# Altium PCB Pira-Smart-RS485-Addon_BAK.PcbDoc (part 1 of 2)
Units mm, origin at the board's own origin, x right, y up, seen from the top; angles counter-clockwise.
Board outline 65.1 x 30.1 mm, 2 copper layers (Top Layer, Bottom Layer); 47 components, 41 nets, 206 pads, 43 vias.
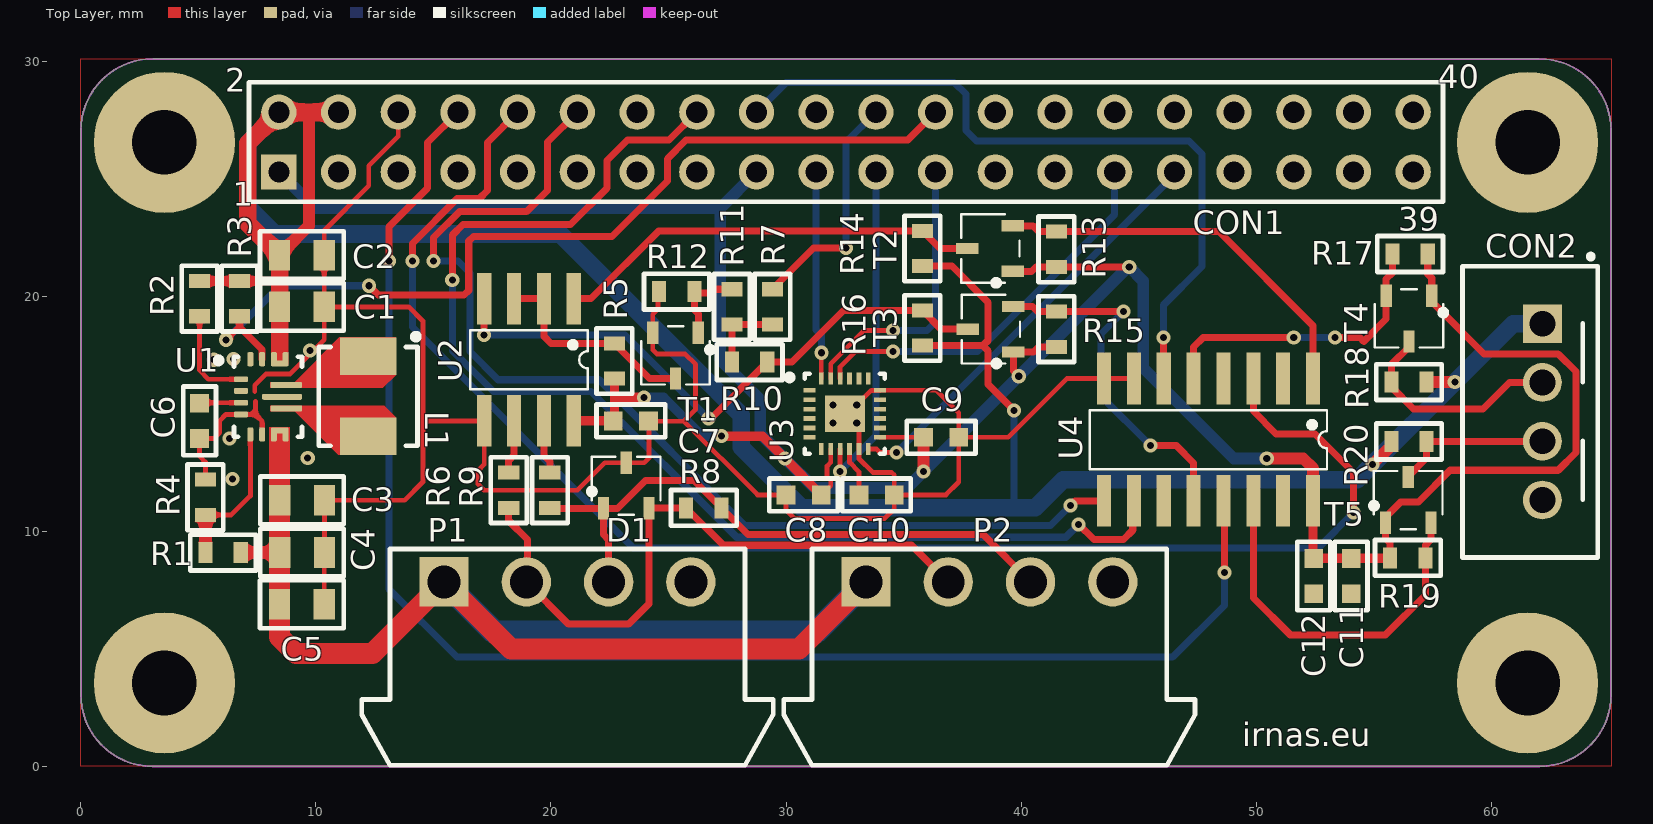
[diagram p0: Top Layer view]
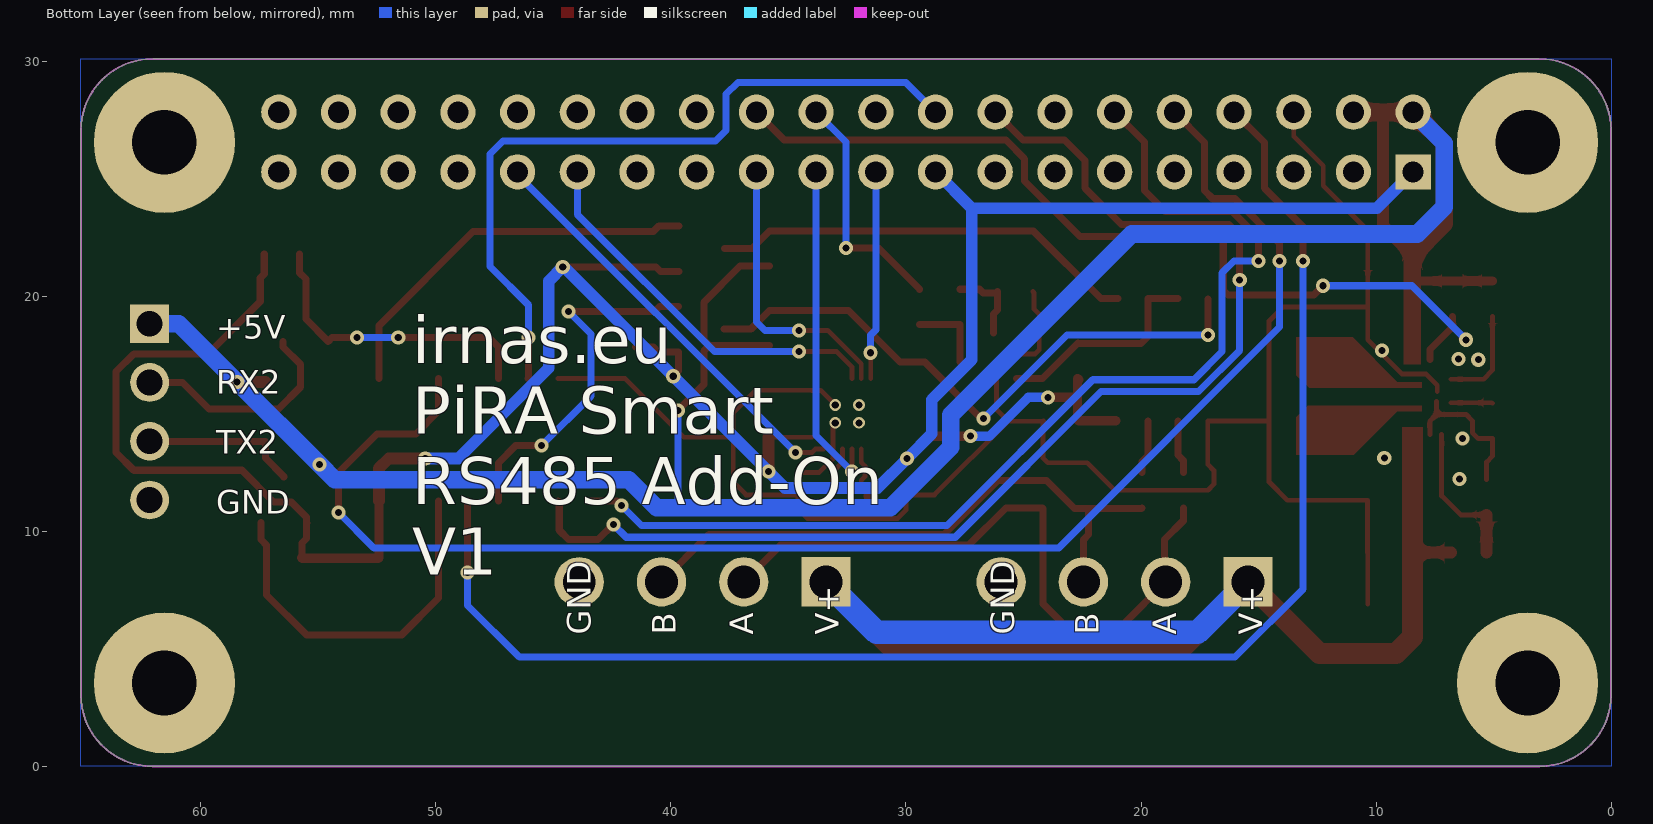
[diagram p1: Bottom Layer view, seen from below]

## Layer stack, top to bottom
Top Solder: solder mask 0.0102, Solder Resist, Dk 3.5
Top Layer: signal copper 0.0356
Dielectric 1: dielectric 0.32, FR-4, Dk 4.8
Bottom Layer: signal copper 0.0356
Bottom Solder: solder mask 0.0102, Solder Resist, Dk 3.5

## Board outline
0,3.05 0,27.05 cw(c3.05,27.05) 3.05,30.101 cw(c3.05,30.05) 3.05,30.101 62.05,30.101 cw(c62.05,27.05) 65.101,27.05 65.101,3.05 cw(c62.05,3.05) 62.05,0 3.05,0 cw(c3.05,3.05)

## Design rules (kind name [scope] priority, off if disabled: settings)
Clearance [All] p1: gap=0.152 ignorepadtopadclearanceinfootprint=FALSE
ComponentClearance [All] p1: gap=0 collisioncheckmode=3 verticalgap=0 showdistances=FALSE
HoleSize [All] p1: absolutevalues=TRUE maxlimit=3 minlimit=0.3 maxpercent=80.000 minpercent=20.000
PolygonConnect [All] p1: thpad.connectstyle=Relief thpad.reliefconductorwidth=0.3 thpad.reliefentries=4 thpad.polygonreliefangle="90 Angle" thpad.airgapwidth=0.254 smdpad.connectstyle=Relief smdpad.reliefconductorwidth=0.3 smdpad.reliefentries=4 smdpad.polygonreliefangle="90 Angle" smdpad.airgapwidth=0.254 via.connectstyle=Direct via.reliefconductorwidth=0.254 via.reliefentries=4 via.polygonreliefangle="90 Angle" via.airgapwidth=0.254
RoutingVias [All] p1: holewidth=0.3 width=0.6 viastyle="Through Hole" minholewidth=0.2 minwidth=0.5 maxholewidth=1 maxwidth=15
SilkToSilkClearance [All] p1: silktosilkclearance=0
SolderMaskExpansion [All] p1: expansion=0.102
Width [All] p1: maxlimit=3 minlimit=0.203 preferedwidth=0.203
27 further rules are at their usual default settings.

## Classes and differential pairs
component class UART_MUX: C11 C12 R13 R14 R15 R16 R17 R18 R19 R20 T2 T3 T4 T5 U4
component class ACCEL: C8 C9 C10 U3
component class RS485: C7 D1 R5 R6 R7 R8 R9 R10 R11 R12 T1 U2
component class POWER: C1 C2 C3 C4 C5 C6 L1 R1 R2 R3 R4 U1
component class MAIN: CON1 CON2 P1 P2

## Components (designator, comment, footprint, x,y, rotation, side; value= is the part's Value field where it differs from the comment)
C1 "10uF /16V" CAP0805 9.4,19.55 r180 top
C2 "10uF /16V" CAP0805 9.4,21.75 r180 top
C3 "22uF /16V" CAP0805 9.41,11.32 r180 top
C4 "22uF /16V" CAP0805 9.41,9.1 r180 top
C5 "10uF /16V" CAP0805 9.4,6.9 r180 top
C6 "100nF" CAP0603 5.05,14.7 r90 top
C7 "100nF" CAP0603 23.4,14.7 r180 top
C8 "100nF" CAP0603 30.75,11.55 r180 top
C9 "10nF" CAP0603 36.6,14 r0 top
C10 "100nF" CAP0603 33.85,11.55 r0 top
C11 "100nF" CAP0603 54.042,8.1 r90 top
C12 "1uF" CAP0603 52.45,8.1 r90 top
CON1 "Raspberry Pi Header" HDR2X20 8.422,25.293 r0 top locked
CON2 "JST-xH" JST-xH 62.1,15.05 r90 top locked
D1 "CDSOT23-SM712" SOT23-3AL 23.2,11.95 r90 top
L1 "1.5uH" FDSD0402 12.218,15.745 r0 top
P1 "WR-TBL - 691305140004" 691305140004 20.7,4.65 r0 top locked
P2 "WR-TBL - 691305140004" 691305140004 38.65,4.65 r0 top locked
R1 "1M02" RES0603 6.05,9.1 r0 top
R2 "100k" RES0603 5.05,19.9 r90 top
R3 "100k" RES0603 6.75,19.9 r90 top
R4 "100k" RES0603 5.3,11.45 r270 top
R5 "10k" RES0603 22.7,17.25 r270 top
R6 "10R" RES0603 19.95,11.75 r270 top
R7 "0R" RES0603 29.421,19.55 r90 top
R8 "120R" RES0603 26.5,11 r0 top
R9 "10R" RES0603 18.2,11.75 r270 top
R10 "0R" RES0603 28.45,17.2 r0 top
R11 "10k" RES0603 27.7,19.55 r270 top
R12 "10k" RES0603 25.35,20.2 r0 top
R13 "10k" RES0603 41.5,22 r270 top
R14 "10k" RES0603 35.8,22.033 r270 top
R15 "10k" RES0603 41.5,18.6 r270 top
R16 "10k" RES0603 35.8,18.65 r270 top
R17 "10k" RES0603 56.55,21.8 r0 top
R18 "10k" RES0603 56.5,16.35 r0 top
R19 "10k" RES0603 56.45,8.874 r180 top
R20 "10k" RES0603 56.5,13.824 r180 top
T1 "BSS123" SOT23-3AL 25.3,17.474 r270 top
T2 "BSS123" SOT23-3AL 38.68,22.033 r180 top
T3 "BSS123" SOT23-3AL 38.7,18.6 r180 top
T4 "BSS123" SOT23-3AL 56.5,19.05 r270 top
T5 "BSS123" SOT23-3AL 56.47,11.344 r90 top
U1 "TPS63070RNMT" "VQFN TPS" 7.773,15.724 r270 top
U2 "SN65HVD72" "SOIC-8 REFLOW" 19.065,17.3 r180 top
U3 "MPU-9250" QFN40P300X300X105_HS-25N 32.5,15 r0 top
U4 "SN74LV4052A" SOIC-16 51.515,9.5 r180 top

## Footprints (in the part's own frame and the unit in brackets; to place one, negate y for a bottom-side part, rotate by r counter-clockwise, add the part's x,y. Pads: shape width x height; smd on the part's side, far side on the other; paste and mask are expansions set on the pad)
691305140004 [mm] "Horizontal PCB Header with Plastic Latch, pitch 3.5mm, 04p"
  rect 2.1x2.1 hole 1.4: 1(-5.25,3.2)
  round 2.1 hole 1.4: 2(-1.75,3.2) 3(1.75,3.2) 4(5.25,3.2)
  silkscreen extent -8.75,-4.6 8.75,4.6, body extent -8.75,-4.6 8.75,4.6, height 7.25
CAP0603 [mm]
  rect 0.8x0.8 smd: 1(-0.75,0) 2(0.75,0)
  silkscreen extent -1.46,-0.7 1.46,0.7, body extent -0.8,-0.4 0.8,0.4, height 0.9
CAP0805 [mm]
  rect 0.9x1.3 smd: 1(-0.95,0) 2(0.95,0)
  silkscreen extent -1.78,-1.02 1.78,1.02, body extent -1,-0.6 1,0.6, height 1.5
FDSD0402 [mm]
  rect 2.4x1.6 smd: 1(0,1.7) 2(0,-1.7)
  silkscreen extent -2.1,-2.1 2.16,2.66, body extent -2.1,-2.2 2.1,2.2, height 2.1
HDR2X20 [mm] "Connector; Header; 20x2 Position"
  rect 1.5x1.5 hole 0.9: 1(0,0)
  round 1.5 hole 0.9: 2(0,2.54) 3(2.54,0) 4(2.54,2.54) 5(5.08,0) 6(5.08,2.54) 7(7.62,0) 8(7.62,2.54) 9(10.16,0) 10(10.16,2.54) 11(12.7,0) 12(12.7,2.54) 13(15.24,0) 14(15.24,2.54) 15(17.78,0) 16(17.78,2.54) 17(20.32,0) 18(20.32,2.54) 19(22.86,0) 20(22.86,2.54) 21(25.4,0) 22(25.4,2.54) 23(27.94,0) 24(27.94,2.54) 25(30.48,0) 26(30.48,2.54) 27(33.02,0) 28(33.02,2.54) 29(35.56,0) 30(35.56,2.54) 31(38.1,0) 32(38.1,2.54) 33(40.64,0) 34(40.64,2.54) 35(43.18,0) 36(43.18,2.54) 37(45.72,0) 38(45.72,2.54) 39(48.26,0) 40(48.26,2.54)
  silkscreen extent -1.27,-1.27 49.53,3.81
JST-xH [mm]
  rect 1.65x1.65 hole 1.1: 1(3.784,-0.078)
  round 1.65 hole 1.1: 2(1.284,-0.078) 3(-1.216,-0.078) 4(-3.716,-0.078)
  silkscreen extent -6.17,-2.43 6.72,3.32, body extent -6.23,-2.48 6.17,3.27, height 7
QFN40P300X300X105_HS-25N [mm] "QFN, 24-Leads, Body 3.00x3.00mm, Pitch 0.40mm, Thermal Pad 1.70x1.54mm, IPC Medium Density"
  rect 0.5x0.2 smd: 1(-1.5,1) 2(-1.5,0.6) 3(-1.5,0.2) 4(-1.5,-0.2) 5(-1.5,-0.6) 6(-1.5,-1) 13(1.5,-1) 14(1.5,-0.6) 15(1.5,-0.2) 16(1.5,0.2) 17(1.5,0.6) 18(1.5,1)
  rect 0.2x0.5 smd: 7(-1,-1.5) 8(-0.6,-1.5) 9(-0.2,-1.5) 10(0.2,-1.5) 11(0.6,-1.5) 12(1,-1.5) 19(1,1.5) 20(0.6,1.5) 21(0.2,1.5) 22(-0.2,1.5) 23(-0.6,1.5) 24(-1,1.5)
  rect 1.7x1.54 smd paste-0.2: 25(0,0)
  silkscreen extent -2.47,-1.7 1.7,1.7, body extent -1.55,-1.55 1.55,1.55, height 1.05
RES0603 [mm]
  rect 0.6x0.9 smd: 1(-0.75,0) 2(0.75,0)
  silkscreen extent -1.4,-0.76 1.4,0.76, body extent -0.8,-0.42 0.8,0.42, height 0.8
"SOIC-8 REFLOW" [mm] "5 X 6,2 X 1,75; P1,27"
  rect 0.6x2.2 smd: 1(-1.905,-2.6) 2(-0.635,-2.6) 3(0.635,-2.6) 4(1.905,-2.6) 5(1.905,2.6) 6(0.635,2.6) 7(-0.635,2.6) 8(-1.905,2.6)
  silkscreen extent -2.5,-1.25 2.5,1.25, body extent -2.45,-2.94 2.45,3.05, height 1.6
SOIC-16 [mm]
  rect 0.6x2.2 smd: 1(-0.905,-7) 2(0.365,-7) 3(1.635,-7) 4(2.905,-7) 5(4.175,-7) 6(5.445,-7) 7(6.715,-7) 8(7.985,-7) 9(7.985,-1.8) 10(6.715,-1.8) 11(5.445,-1.8) 12(4.175,-1.8) 13(2.905,-1.8) 14(1.635,-1.8) 15(0.365,-1.8) 16(-0.905,-1.8)
  silkscreen extent -1.5,-5.65 8.6,-3.15, body extent -1.45,-7.44 8.55,-1.36, height 1.65
SOT23-3AL [mm]
  rect 0.95x0.48 smd: 1(-0.97,0.97) 2(-0.97,-0.97) 3(0.97,0)
  silkscreen extent -1.25,-1.46 1.23,1.58, body extent -1.25,-1.46 1.23,1.46, height 0.95
"VQFN TPS" [mm]
  rrect50% 0.25x0.6 smd: 1(-0.75,-0.962) 2(-0.25,-0.962) 3(0.25,-0.962) 4(0.75,-0.962)
  rrect50% 0.6x0.25 smd: 5(1.6,-0.562) 6(1.6,-0.062) 7(1.6,0.438) 8(1.6,0.938) 12(-1.6,0.938) 13(-1.6,0.438) 14(-1.6,-0.062) 15(-1.6,-0.562)
  rrect50% 0.25x0.7 smd: 7(1.425,0.688) 13(-1.425,0.688)
  rrect50% 0.25x1.35 smd: 9(0.5,0.963) 11(-0.5,0.963)
  rrect50% 0.25x1.7 smd: 10(0,0.788)
  silkscreen extent -1.7,-2.04 1.7,1.64, body extent -1.56,-1.12 1.56,1.5, height 1

## Part data
C1 C2 C5: library part "C - 10uF /16V", "TDK - CGA4J1X5R1C106K125AC - CAP, MLCC, X5R, 10UF, 16V, 0805", Manufacturer=TDK, Manufacturer Part Number=CGA4J1X5R1C106K125AC, Supplier Part Number 1=2210948RL, ComponentLink1Description=http://bcove.me/e1v54mtm, ComponentLink1URL=http://bcove.me/e1v54mtm, ComponentLink2Description=http://www.farnell.com/datasheets/1936565.pdf, ComponentLink2URL=http://www.farnell.com/datasheets/1936565.pdf, ComponentLink3Description=http://www.farnell.com/datasheets/1683658.pdf, ComponentLink3URL=http://www.farnell.com/datasheets/1683658.pdf, Pricing 1="5=0.41, 50=0.146, 250=0.131, 500=0.12, 1000=0.103 (GBP)", RoHS=YES, Stock 1=8974, Supplier 1=Farnell
C3 C4: library part "C - 22u 6.3V 0805", "MULTICOMP - MC0805X226M6R3CT - CAP, MLCC, X5R, 22UF, 0805", Capacitance=22, Capacitance Tolerance="± 20%", Capacitor Terminals=SMD, Ceramic Capacitor Case="0805 [2012 Metric]", Dielectric Characteristic=X5, Manufacturer=MULTICOMP, Manufacturer Part Number=MC0805X226M6R3CT, Operating Temperature Max=85, Operating Temperature Min=-55, Operating Temperature Range="-55°C to +85°C<!--FANDB--><div class=\"features-and-benefits-container\"><div class=\"features-and-benefits-desc-container\"><span class=\"features-and-benefits-container-desc\">SMD Multilayer Ceramic Capacitor, 0805 [2012 Metric], 22 µF, 6.3 V, ± 20%, X5R, MC Series</span></div><div class=\"features-and-benefits-description\"><span class=\"features-benefits-value\">The Multicomp MC series is general purpose MLCC capacitors with X5R dielectric material which provides high electrical precision, stability and reliability. This MLCC capacitor consists of a conducting material and electrodes with high density and high efficiency ceramic condensers.</span></div><div class=\"features-and-benefits-list\"><ul class=\"features-and-benefits-list-list\"><li class=\"features-and-benefits-list-item\">Small size with higher capacitance values</li><li class=\"features-and-benefits-list-item\">0201, 0402, 0603, 0805, 1206, 1210, 1812 case sizes available</li><li class=\"features-and-benefits-list-item\">Capacitance value ranging from 100pF to 220?F</li><li class=\"features-and-benefits-list-item\">Capacitor with lead free termination (pure Tin)</li><li class=\"features-and-benefits-list-item\">High electrical precision, stability and reliability</li><li class=\"features-and-benefits-list-item\">Rated voltage of 4V, 6.3V, 10V, 16V, 25V, 50V</li><li class=\"features-and-benefits-list-item\">Operating temperature of -55°C to +85°C</li><li class=\"features-and-benefits-list-item\">Available in ±10% and ±20", Supplier Part Number 1=1759415, Voltage Rating=6.3, Automotive Qualification Standard=-, Capacitance Tolerance ±="± 20%", ComponentLink1Description=http://www.farnell.com/datasheets/1901289.pdf, ComponentLink1URL=http://www.farnell.com/datasheets/1901289.pdf, ComponentLink2Description=http://www.farnell.com/datasheets/1932399.pdf, ComponentLink2URL=http://www.farnell.com/datasheets/1932399.pdf, MSL=-, Packaging="Cut Tape", Pricing 1="5=0.128, 50=0.0738, 250=0.0507, 500=0.042, 1500=0.0358 (GBP)", Product Range="MC Series", RoHS=YES, Stock 1=74736, Supplier 1=Farnell, SVHC="No SVHC (07-Jul-2017)"
C6: library part "C - 100nF", "MURATA - GRM188R71C104KA01J - CAP, MLCC, X7R, 0.1UF, 16V, 0603", Capacitance=0.1, Capacitance Tolerance="± 10%", Ceramic Capacitor Case="0603 [1608 Metric]", Dielectric Characteristic=X7, Manufacturer=MURATA, Manufacturer Part Number=GRM188R71C104KA01J, Operating Temperature Max=125, Operating Temperature Min=-55, Supplier Part Number 1=2688519, Voltage Rating=16, Automotive Qualification Standard=-, ComponentLink1Description=http://www.farnell.com/datasheets/2189124.pdf, ComponentLink1URL=http://www.farnell.com/datasheets/2189124.pdf, MSL="MSL 1 - Unlimited", Packaging="Cut Tape", Pricing 1="10=0.0145, 100=0.0126, 500=0.0081, 2500=0.0059, 5000=0.0052, 10000=0.0046, 50000=0.0036, 100000=0.0035 (GBP)", Product Range="GRM Series", RoHS=YES, Stock 1=18297, Supplier 1=Farnell, SVHC="No SVHC (20-Jun-2016"
C7 C8 C10 C11: library part "C - 100nF", "MURATA - GRM188R71C104KA01J - CAP, MLCC, X7R, 0.1UF, 16V, 0603", Capacitance=0.1, Capacitance Tolerance="± 10%", Ceramic Capacitor Case="0603 [1608 Metric]", Dielectric Characteristic=X7, IRNAS Part No.=I-200005, Manufacturer=MURATA, Manufacturer Part Number=GRM188R71C104KA01J, Operating Temperature Max=125, Operating Temperature Min=-55, Supplier Part Number 1=2688519, Voltage Rating=16, Automotive Qualification Standard=-, ComponentLink1Description=http://www.farnell.com/datasheets/2189124.pdf, ComponentLink1URL=http://www.farnell.com/datasheets/2189124.pdf, MSL="MSL 1 - Unlimited", Packaging="Cut Tape", Pricing 1="10=0.0145, 100=0.0126, 500=0.0081, 2500=0.0059, 5000=0.0052, 10000=0.0046, 50000=0.0036, 100000=0.0035 (GBP)", Product Range="GRM Series", RoHS=YES, Stock 1=18297, Supplier 1=Farnell, SVHC="No SVHC (20-Jun-2016"
C9: library part "C - 10nF", "KEMET - C0603X103K5RECAUTO - CAP, MLCC, AEC-Q200, X7R, 0.01UF, 50V", IRNAS Part No.=I-200004, Manufacturer="TDK EPCOS", Manufacturer Part Number=C0603X103K5RECAUTO, Supplier Part Number 1=2760492, ComponentLink1Description=http://www.farnell.com/datasheets/2290180.pdf, ComponentLink1URL=http://www.farnell.com/datasheets/2290180.pdf, Pricing 1="10=0.133, 100=0.0731, 500=0.055, 1000=0.0465, 2000=0.0408, 4000=0.0336, 20000=0.0295 (GBP)", Stock 1=307350, Supplier 1=Farnell
C12: library part "C - 1uF", "MURATA - GRM188R61H105KAALD - CAP, MLCC, X5R, 1UF, 50V, 0603", Capacitance=1, Capacitance Tolerance="± 10%", Capacitor Terminals="SMD<!--FANDB--><div class=\"features-and-benefits-container\"><div class=\"features-and-benefits-description\"><span class=\"features-benefits-value\">The Murata GRM series capacitors are Multilayer Ceramic Chip Capacitors (MLCC) used for general purpose applications. These MLCC capacitors are classified into temperature compensating and high dielectric constant types depending on the change in electrostatic capacitance due to change in temperature. The temperature compensating capacitors feature a small rate of change in electrostatic capacitance as the temperature changes and are used for applications such as filters and high frequency circuit matching. The high dielectric constant capacitors use materials with a high dielectric constant and feature a large electrostatic capacitance. Typical applications are power supply decoupling and smoothing circuits.</span></div><div class=\"features-and-benefits-list\"><ul class=\"features-and-benefits-list-list\"><li class=\"features-and-benefits-list-item\">Large capacity and small size in a multilayer structure</li><li class=\"features-and-benefits-list-item\">Capacitance value ranging from 0.1pF to 220?F</li><li class=\"features-and-benefits-list-item\">Tin plated external electrodes, excellent solderability</li><li class=\"features-and-benefits-list-item\">Provides good high frequency characteristics</li><li class=\"features-and-benefits-list-item\">Excellent pulse response</li><li class=\"features-and-benefits-list-item\">High reliability</li><li class=\"features-and-benefits-list-item\">Capacitor size varies from 0.4×0.2mm to 5.7×5.0mm</li><li class=\"features-and-benefits-list-item\">Rated voltage of 2.5VDC to 3.15", Ceramic Capacitor Case="0603 [1608 Metric]", Dielectric Characteristic=X5, IRNAS Part No.=I-200006, Manufacturer=MURATA, Manufacturer Part Number=GRM188R61H105KAALD, Operating Temperature Max=85, Operating Temperature Min=-55, Supplier Part Number 1=1845736, Voltage Rating=50, Automotive Qualification Standard=-, Capacitance Tolerance ±="± 10%", ComponentLink1Description=http://www.farnell.com/datasheets/2048611.pdf, ComponentLink1URL=http://www.farnell.com/datasheets/2048611.pdf, MSL=-, Packaging="Cut Tape", Pricing 1="10=0.093, 100=0.062, 500=0.0507, 1000=0.0465, 2000=0.0429, 4000=0.0399, 20000=0.0372, 40000=0.0365 (GBP)", Product Range="GRM Series", RoHS=YES, Stock 1=62682, Supplier 1=Farnell, SVHC="No SVHC (17-Dec-2015)"
CON1: "Header, 20-Pin, Dual row", LatestRevisionDate=17-Jul-2002, LatestRevisionNote="Re-released for DXP Platform.", Publisher="Altium Limited"
CON2: library part B4B-XH-A(LF)(SN), "4 Positions Header, Shrouded Connector 0.098\" (2.50mm) Through Hole Tin", Color=Natural, Current Rating="3 A", Insulation Resistance="1000 MO", Manufacturer=JST, Operating Temp Range="-25 to +85 °C", Supplier Part Number 1=1516278, Voltage Rating="250 V", ComponentLink1Description=https://datasheet.ciiva.com/26894/getdatasheetpartid-455616-26894787.pdf, ComponentLink1URL=https://datasheet.ciiva.com/26894/getdatasheetpartid-455616-26894787.pdf, ComponentLink2Description=https://datasheet.ciiva.com/26924/getdatasheetpartid-640571-26924035.pdf, ComponentLink2URL=https://datasheet.ciiva.com/26924/getdatasheetpartid-640571-26924035.pdf, ComponentLink3Description=https://datasheet.ciiva.com/16203/b4b-xh-alfsn-16203642.pdf, ComponentLink3URL=https://datasheet.ciiva.com/16203/b4b-xh-alfsn-16203642.pdf, ComponentLink4Description=https://datasheet.ciiva.com/726/exh-726404.pdf, ComponentLink4URL=https://datasheet.ciiva.com/726/exh-726404.pdf, Contact Material=Brass, Contact Plating=Tin, Gender=Male, Manufacturer Part Number=B4B-XH-A(LF)(SN), Material=Polyamide, Mating Type="Detent Lock", No of Positions=4, No of Rows=1, Pitch="2.5 mm", Stock 1=0, Style/Orientation="Straight Header/Plug", Supplier 1=Farnell, Termination=Crimp, Type="Shrouded Header"
D1: library part "D_TVS - CDSOT23-SM712", "TVS Diode, CDSOT23 Series, Bidirectional, 12 V, 26 V, SOT-23, 3 Pins", Diode Case Style=SOD-123, Forward Current If(AV)=300, Forward Surge Current Ifsm Max=2, Forward Voltage VF Max=1.25, Manufacturer="DIODES INC.", Manufacturer Part Number=1N4148W-7-F., Operating Temperature Max=150, Operating Temperature Min=-65, Operating Temperature Range="-65°C to +150°C<!--FANDB--><div class=\"features-and-benefits-container\"><div class=\"features-and-benefits-description\"><span class=\"features-benefits-value\">The 1N4148W-7-F is a surface mount fast Switching Diode with moulded plastic case. Suitable for general purpose switching applications.</span></div><div class=\"features-and-benefits-list\"><ul class=\"features-and-benefits-list-list\"><li class=\"features-and-benefits-list-item\">Fast Switching Speed</li><li class=\"features-and-benefits-list-item\">2", Repetitive Reverse Voltage Vrrm Max=100, Supplier Part Number 1=1776392, Automotive Qualification Standard=-, ComponentLink1Description=http://www.farnell.com/datasheets/2238378.pdf, ComponentLink1URL=http://www.farnell.com/datasheets/2238378.pdf, Diode Configuration=Single, Diode Type=Switching, MSL="MSL 1 - Unlimited", No. of Pins=2, Packaging="Cut Tape", Pricing 1="1=0.136, 25=0.132, 100=0.0465, 500=0.042, 1000=0.024, 3000=0.021, 9000=0.017, 30000=0.0149 (GBP)", Product Range="1N4148 Series", Reverse Recovery Time trr Max=4, RoHS=YES, Stock 1=157320, Supplier 1=Farnell, SVHC="No SVHC (17-Dec-2015)"
L1: library part "L - 1.5uH 5.1A", "MURATA - FDSD0420-H-1R5M=P3 - INDUCTOR, SHIELDED, 1.5UH, 5.1A, 20%", DC Resistance Max=0.036, Inductance=1.5, Inductance Tolerance="± 20%", Inductor Construction=Shielded, Manufacturer=MURATA, Manufacturer Part Number=FDSD0420-H-1R5M=P3, Power Inductor Case="4.2mm x 4.2mm x 2", RMS Current (Irms)=5.1, Saturation Current (Isat)=7.7, Supplier Part Number 1=2530091, ComponentLink1Description=http://www.farnell.com/datasheets/2021980.pdf, ComponentLink1URL=http://www.farnell.com/datasheets/2021980.pdf, MSL="MSL 1 - Unlimited<!--FANDB--><div class=\"features-and-benefits-container\"></div>", Packaging=Each, Pricing 1="5=0.79, 50=0.448, 250=0.422, 500=0.377, 1000=0.305, 2000=0.298, 10000=0.291, 20000=0.284 (GBP)", Product Range="FDSD0420 Series", RoHS=YES, Stock 1=1471, Supplier 1=Farnell, SVHC="No SVHC (17-Dec-2015)"
P1 P2: "Serie 3051 - 3.50mm Horizontal PCB Header with Plastic Latch WR-TBL, 4 pin", Operating Temperature="-40 to 105 degC", Part Number=691305140004, ComponentLink1Description=Manufacturer, ComponentLink1URL=http://www.we-online.de, ComponentLink2Description=Datasheet, ComponentLink2URL=http://katalog.we-online.de/em/datasheet/691305140004.pdf, Gender=Male, Mounting Technology=THT, Packaging=Box, Pin Number=4, Pitch="3.50 mm", Published Date="June 2018", Publisher="Wurth Elektronik"
R1: library part "R - 100k", "MULTICOMP - MCMR06X104 JTL - RES, CERAMIC, 1M02, 1%, 0.1W, 0603", Manufacturer=MULTICOMP, Manufacturer Part Number="MCMR06X104 JTL", Power Rating=100, Resistance Tolerance="± 1%", Resistor Case Style="0603 [1608 Metric]", Resistor Element Material=Ceramic, Resistor Mounting="Surface Mount Device<!--FANDB--><div class=\"features-and-benefits-container\"><div class=\"features-and-benefits-description\"><span class=\"features-benefits-value\">The Multicomp MCMR series resistors are automotive grade, anti sulphured thick film chip resistor. The resistance range includes E24 and E96 decade values from 1ohm to 10Mohm. These resistors are constructed on top of a high grade ceramic body.</span></div><div class=\"features-and-benefits-list\"><ul class=\"features-and-benefits-list-list\"><li class=\"features-and-benefits-list-item\">EIA 0402, 0603, 0805, 1206 chip sizes available</li><li class=\"features-and-benefits-list-item\">High reliability and stability</li><li class=\"features-and-benefits-list-item\">Automotive grade AEC-Q200 compliant</li><li class=\"features-and-benefits-list-item\">Complaint with (IEC 60068-1) 55/155/56 climatic category</li><li class=\"features-and-benefits-list-item\">Maximum operation voltage of 50V, 75V, 150V and 200V</li><li class=\"features-and-benefits-list-item\">Power rating of 62.5mW, 100mW, 125mW and 250mW</li><li class=\"features-and-benefits-list-item\">Available in ±1% and ±5% tolerance</li><li class=\"features-and-benefits-list-item\">Temperature coefficient (TCR) of +200ppm/°C, +100ppm/°C and -200ppm/°C to +400ppm/°C</li><li class=\"features-and-benefits-list-item\">Operating temperature range -55°C to 155", Supplier Part Number 1=2073357, Temperature Coefficient="± 100", Voltage Rating=75, Automotive Qualification Standard=-, ComponentLink1Description=http://www.farnell.com/datasheets/1716707.pdf, ComponentLink1URL=http://www.farnell.com/datasheets/1716707.pdf, Packaging="Cut Tape", Pricing 1="10=0.0109, 100=0.0085, 500=0.006, 1000=0.0048, 2500=0.004, 5000=0.003, 25000=0.002, 50000=0.0016 (GBP)", Product Range="MCMR Series", Resistance=100, RoHS=Y-EX, Stock 1=187, Supplier 1=Farnell
R2 R3: library part "R - 100k", "MULTICOMP - MCMR06X104 JTL - RES, CERAMIC, 100K, 5%, 0.1W, 0603", Manufacturer=MULTICOMP, Manufacturer Part Number="MCMR06X104 JTL", Power Rating=100, Resistance Tolerance="± 5%", Resistor Case Style="0603 [1608 Metric]", Resistor Element Material=Ceramic, Resistor Mounting="Surface Mount Device<!--FANDB--><div class=\"features-and-benefits-container\"><div class=\"features-and-benefits-description\"><span class=\"features-benefits-value\">The Multicomp MCMR series resistors are automotive grade, anti sulphured thick film chip resistor. The resistance range includes E24 and E96 decade values from 1ohm to 10Mohm. These resistors are constructed on top of a high grade ceramic body.</span></div><div class=\"features-and-benefits-list\"><ul class=\"features-and-benefits-list-list\"><li class=\"features-and-benefits-list-item\">EIA 0402, 0603, 0805, 1206 chip sizes available</li><li class=\"features-and-benefits-list-item\">High reliability and stability</li><li class=\"features-and-benefits-list-item\">Automotive grade AEC-Q200 compliant</li><li class=\"features-and-benefits-list-item\">Complaint with (IEC 60068-1) 55/155/56 climatic category</li><li class=\"features-and-benefits-list-item\">Maximum operation voltage of 50V, 75V, 150V and 200V</li><li class=\"features-and-benefits-list-item\">Power rating of 62.5mW, 100mW, 125mW and 250mW</li><li class=\"features-and-benefits-list-item\">Available in ±1% and ±5% tolerance</li><li class=\"features-and-benefits-list-item\">Temperature coefficient (TCR) of +200ppm/°C, +100ppm/°C and -200ppm/°C to +400ppm/°C</li><li class=\"features-and-benefits-list-item\">Operating temperature range -55°C to 155", Supplier Part Number 1=2073357, Temperature Coefficient="± 100", Voltage Rating=75, Automotive Qualification Standard=-, ComponentLink1Description=http://www.farnell.com/datasheets/1716707.pdf, ComponentLink1URL=http://www.farnell.com/datasheets/1716707.pdf, Packaging="Cut Tape", Pricing 1="10=0.0109, 100=0.0085, 500=0.006, 1000=0.0048, 2500=0.004, 5000=0.003, 25000=0.002, 50000=0.0016 (GBP)", Product Range="MCMR Series", Resistance=100, RoHS=Y-EX, Stock 1=187, Supplier 1=Farnell
R4: library part "R - 100k", "MULTICOMP - MCMR06X104 JTL - RES, CERAMIC, 100K, 1%, 0.1W, 0603", Manufacturer=MULTICOMP, Manufacturer Part Number="MCMR06X104 JTL", Power Rating=100, Resistance Tolerance="± 1%", Resistor Case Style="0603 [1608 Metric]", Resistor Element Material=Ceramic, Resistor Mounting="Surface Mount Device<!--FANDB--><div class=\"features-and-benefits-container\"><div class=\"features-and-benefits-description\"><span class=\"features-benefits-value\">The Multicomp MCMR series resistors are automotive grade, anti sulphured thick film chip resistor. The resistance range includes E24 and E96 decade values from 1ohm to 10Mohm. These resistors are constructed on top of a high grade ceramic body.</span></div><div class=\"features-and-benefits-list\"><ul class=\"features-and-benefits-list-list\"><li class=\"features-and-benefits-list-item\">EIA 0402, 0603, 0805, 1206 chip sizes available</li><li class=\"features-and-benefits-list-item\">High reliability and stability</li><li class=\"features-and-benefits-list-item\">Automotive grade AEC-Q200 compliant</li><li class=\"features-and-benefits-list-item\">Complaint with (IEC 60068-1) 55/155/56 climatic category</li><li class=\"features-and-benefits-list-item\">Maximum operation voltage of 50V, 75V, 150V and 200V</li><li class=\"features-and-benefits-list-item\">Power rating of 62.5mW, 100mW, 125mW and 250mW</li><li class=\"features-and-benefits-list-item\">Available in ±1% and ±5% tolerance</li><li class=\"features-and-benefits-list-item\">Temperature coefficient (TCR) of +200ppm/°C, +100ppm/°C and -200ppm/°C to +400ppm/°C</li><li class=\"features-and-benefits-list-item\">Operating temperature range -55°C to 155", Supplier Part Number 1=2073357, Temperature Coefficient="± 100", Voltage Rating=75, Automotive Qualification Standard=-, ComponentLink1Description=http://www.farnell.com/datasheets/1716707.pdf, ComponentLink1URL=http://www.farnell.com/datasheets/1716707.pdf, Packaging="Cut Tape", Pricing 1="10=0.0109, 100=0.0085, 500=0.006, 1000=0.0048, 2500=0.004, 5000=0.003, 25000=0.002, 50000=0.0016 (GBP)", Product Range="MCMR Series", Resistance=100, RoHS=Y-EX, Stock 1=187, Supplier 1=Farnell
R5 R11 R12 R13 R14 R15 R16 R17 R18 R19 R20: library part "R - 10k", "MULTICOMP - MCMR06X103 JTL - RES, CERAMIC, 10K, 5%, 0.1W, 0603", IRNAS Part No.=I-100008, Manufacturer=MULTICOMP, Manufacturer Part Number="MCMR06X103 JTL", Power Rating=100, Resistance=10, Resistance Tolerance="± 5%", Resistor Case Style="0603 [1608 Metric]", Resistor Element Material=Ceramic, Supplier Part Number 1=2073356, Temperature Coefficient="± 100", Voltage Rating=75, Automotive Qualification Standard="-<!--FANDB--><div class=\"features-and-benefits-container\"><div class=\"features-and-benefits-description\"><span class=\"features-benefits-value\">The Multicomp MCMR series resistors are automotive grade, anti sulphured thick film chip resistor. The resistance range includes E24 and E96 decade values from 1ohm to 10Mohm. These resistors are constructed on top of a high grade ceramic body.</span></div><div class=\"features-and-benefits-list\"><ul class=\"features-and-benefits-list-list\"><li class=\"features-and-benefits-list-item\">EIA 0402, 0603, 0805, 1206 chip sizes available</li><li class=\"features-and-benefits-list-item\">High reliability and stability</li><li class=\"features-and-benefits-list-item\">Automotive grade AEC-Q200 compliant</li><li class=\"features-and-benefits-list-item\">Complaint with (IEC 60068-1) 55/155/56 climatic category</li><li class=\"features-and-benefits-list-item\">Maximum operation voltage of 50V, 75V, 150V and 200V</li><li class=\"features-and-benefits-list-item\">Power rating of 62.5mW, 100mW, 125mW and 250mW</li><li class=\"features-and-benefits-list-item\">Available in ±1% and ±5% tolerance</li><li class=\"features-and-benefits-list-item\">Temperature coefficient (TCR) of +200ppm/°C, +100ppm/°C and -200ppm/°C to +400ppm/°C</li><li class=\"features-and-benefits-list-item\">Operating temperature range -55°C to 155", ComponentLink1Description=http://www.farnell.com/datasheets/1716707.pdf, ComponentLink1URL=http://www.farnell.com/datasheets/1716707.pdf, Packaging="Cut Tape", Pricing 1="10=0.0087, 100=0.0074, 500=0.0061, 1000=0.0048, 2500=0.0032, 5000=0.0024, 25000=0.0016, 50000=0.0013 (GBP)", Product Range="MCMR Series", RoHS=Y-EX, Stock 1=19791, Supplier 1=Farnell
R6 R9: library part "R - 10R", "VISHAY - RCA060310R0FKEA - RES, AUTO, THICK FILM, 10R, 1%, 0603", IRNAS Part No.=I-100010, Manufacturer=VISHAY, Manufacturer Part Number=RCA060310R0FKEA, Power Rating=100, Resistance=10, Resistance Tolerance="± 1%", Resistor Case Style="0603 [1608 Metric]", Resistor Element Material="Thick Film", Supplier Part Number 1=2616585, Temperature Coefficient="± 100", Voltage Rating=75, Automotive Qualification Standard=AEC-Q200, ComponentLink1Description=http://www.farnell.com/datasheets/2111201.pdf, ComponentLink1URL=http://www.farnell.com/datasheets/2111201.pdf, Packaging="Cut Tape", Pricing 1="10=0.0803, 100=0.0386, 500=0.0235, 2500=0.015, 5000=0.0135, 10000=0.0108, 50000=0.0068, 100000=0.0067 (GBP)", Product Range="RCA Series", RoHS=YES, Stock 1=9559, Supplier 1=Farnell, SVHC="No SVHC (17-Dec-2015)<!--FANDB--><div class=\"features-and-benefits-container\"><div class=\"features-and-benefits-description\"><span class=\"features-benefits-value\">The RCA series from Vishay are automotive grade, sulphur resistant thick film rectangular chip resistors. The resistance range includes E24 and E96 decade values from 1ohm to 10Mohm. They provide superior resistance against H2S atmosphere. These resistors have metal glaze on high quality ceramic.</span></div><div class=\"features-and-benefits-list\"><ul class=\"features-and-benefits-list-list\"><li class=\"features-and-benefits-list-item\">Automotive grade AEC-Q200 qualified (rev C)</li><li class=\"features-and-benefits-list-item\">EIA 0402, 0603, 0805, 1206, 1210, 1218, 2010 and 2512 case sizes available</li><li class=\"features-and-benefits-list-item\">Available in ±0.5%, ±1% and ±5% tolerances</li><li class=\"features-and-benefits-list-item\">Jumpers are also available</li><li class=\"features-and-benefits-list-item\">±50ppm/K, ±100ppm/K and ±200ppm/K TCR values</li><li class=\"features-and-benefits-list-item\">Power rating of 0.063W, 0.10W, 0.125W, 0.25W, 0.5W, 0.75W and 1W at 70?C</li><li class=\"features-and-benefits-list-item\">Available in 50V, 75V, 150V, 200V, 400V and 500V limiting voltage options</li><li class=\"features-and-benefits-list-item\">Category temperature range from -55?C to 155?C</li><li class=\"features-and-benefits-list-item\">Stability ?R/R = 1 % for 1000h at 70"
R7 R10: library part "R - 0R", "BOURNS - CR0603-J/-000ELF - RES, THICK FILM, 0R, 5%, 0.1W, 0603", IRNAS Part No.=I-100011, Manufacturer=BOURNS, Manufacturer Part Number=CR0603-J/-000ELF, Power Rating=100, Resistance=0, Resistance Tolerance="± 5%", Resistor Case Style="0603 [1608 Metric]", Resistor Element Material="Thick Film", Resistor Mounting="Surface Mount Device<!--FANDB--><div class=\"features-and-benefits-container\"><div class=\"features-and-benefits-description\"><span class=\"features-benefits-value\">The Bourns CR series are standard thick film chip resistors. These resistors provide flexibility of performance, space saving and low cost. The Resistance range includes E96 and E24 decade values from 1ohm to 10Mohm.</span></div><div class=\"features-and-benefits-list\"><ul class=\"features-and-benefits-list-list\"><li class=\"features-and-benefits-list-item\">0201, 0402, 0603, 0805, 1206, 1210, 2010, 2512 standard case sizes available</li><li class=\"features-and-benefits-list-item\">±1% and ±5% tolerance</li><li class=\"features-and-benefits-list-item\">±100ppm/°C, ±200ppm/°C and ±250ppm/°C TCR values available</li><li class=\"features-and-benefits-list-item\">Power rating selectable for 50mW, 63mW, 0.1W, 0.125W, 0.25W, 0.5W and 1W based on ordering</li><li class=\"features-and-benefits-list-item\">Jumpers are available for all size</li><li class=\"features-and-benefits-list-item\">3 layer termination process with nickel barrier prevents leaching & provides excellent solderability</li><li class=\"features-and-benefits-list-item\">Suitable for all type of soldering processes</li><li class=\"features-and-benefits-list-item\">Tight dimensional tolerances</li><li class=\"features-and-benefits-list-item\">Maximum working voltage depends on case size</li><li class=\"features-and-benefits-list-item\">Operating temperature of -55°C to +125°C(CR0201) and -55°C to +155", Supplier Part Number 1=2008343, Temperature Coefficient=-, Voltage Rating=50, Automotive Qualification Standard=-, ComponentLink1Description=http://www.bourns.com/engineering/CHPREZTR/cr0603.stp, ComponentLink1URL=http://www.bourns.com/engineering/CHPREZTR/cr0603.stp, ComponentLink2Description=http://www.farnell.com/datasheets/2178762.pdf, ComponentLink2URL=http://www.farnell.com/datasheets/2178762.pdf, MSL="MSL 1 - Unlimited", Packaging="Cut Tape", Pricing 1="10=0.0146, 250=0.0097, 1000=0.0073, 5000=0.0049, 12500=0.0042 (GBP)", Product Range="CR Series", RoHS=YES, Stock 1=58200, Supplier 1=Farnell, SVHC="No SVHC (17-Dec-2015)"
R8: library part "R - 120R", "RES SMD 120 OHM 1% 1/4W 0603", Case/Package=0603, Case Code (Metric)=1608, IRNAS Part No.=/, Manufacturer=Vishay, Manufacturer Part Number=CRCW0603120RFKEAHP, Max Operating Temperature=155°C, Max Power Dissipation=250mW, Min Operating Temperature=-55°C, Package Quantity=5000, Supplier Part Number 1=1738892, Temperature Coefficient=100ppm/°C, Tolerance=1%, Voltage Rating=75V, Case Code (Imperial)=0603, ComponentLink1Description=https://datasheet.ciiva.com/5852/424479-5852064.pdf, ComponentLink1URL=https://datasheet.ciiva.com/5852/424479-5852064.pdf, ComponentLink2Description=https://datasheet.ciiva.com/2578/crcwhpe3-2578529.pdf, ComponentLink2URL=https://datasheet.ciiva.com/2578/crcwhpe3-2578529.pdf, ComponentLink3Description=https://datasheet.ciiva.com/8975/crcwhpe3-8975275.pdf, ComponentLink3URL=https://datasheet.ciiva.com/8975/crcwhpe3-8975275.pdf, ComponentLink4Description=https://datasheet.ciiva.com/7777/424479-7777277.pdf, ComponentLink4URL=https://datasheet.ciiva.com/7777/424479-7777277.pdf, ComponentLink5Description=https://datasheet.ciiva.com/7777/424479-7777278.pdf, ComponentLink5URL=https://datasheet.ciiva.com/7777/424479-7777278.pdf, Composition="Thick Film", Contact Plating=Tin, Depth=0.85mm, Features="Automotive AEC-Q200", Height=0.022inch, Length=1.6mm, Military Standard=Not, Number of Terminations=2, Packaging="Tape and Reel", Power Rating=250mW, Pricing 1="10=0.141, 100=0.0937, 500=0.0669, 1000=0.0453 (EUR)", Radiation Hardening=No, REACH SVHC=Unknown, Resistance=120R, Stock 1=34760, Supplier 1=Farnell, Termination=SMD/SMT, Width=0.033inch
T1 T2 T3 T4 T5: library part "T_M - BSS123", "N-Channel Vds = 100V, Id = 170 mA", Author="Ciril Golob", ComponentLink1Description=Datasheet, ComponentLink2Description="Datasheet www", ComponentLink2URL=http://www.onsemi.com/pub/Collateral/BSS123-D.PDF, Date=11.07.2018, ELRAD Id sifra / ELRAD Id No=597778, FIT=0.44, Komp / Device=SMD, Opis / Description="MOSFET BSS123       /N-Channel", Velikost / Size=SOT23
  T1: ComponentLink1URL=c:\altium\Altium_Library\Libraries\Active\Datasheet\BSS123.pdf
  T2 T3 T4 T5: ComponentLink1URL=c:\ELRADSVN\Altium_Library\Libraries\Active\Datasheet\BSS123.pdf
U1: library part "V_SW - TPS63070RNMT", "TEXAS INSTRUMENTS - TPS63070RNMT - DC/DC CONV, BUCK-BOOST, 2.4MHZ, VQFN-15", DC / DC Converter IC Case=VQFN, Input Voltage Max=16, Input Voltage Min=2, Manufacturer="TEXAS INSTRUMENTS", Operating Temperature Max=125, Output Voltage Nom.=5, Supplier Part Number 1=595-TPS63070RNMR, Switching Frequency=2.4, Automotive Qualification Standard=-, ComponentLink1Description=http://www.ti.com/general/docs/lit/getliterature.tsp?genericPartNumber=TPS63070&fileType=pdf, ComponentLink1URL=http://www.ti.com/general/docs/lit/getliterature.tsp?genericPartNumber=TPS63070&fileType=pdf, Manufacturer Part Number=TPS63070RNMT, MSL="MSL 1 - Unlimited", No. of Pins=15, Output Current=2, Packaging="Cut Tape", Pricing 1="1=2.23, 10=1.87, 100=1.7, 250=1.56, 500=1.47, 1000=1.21 (GBP)", Product Range=-, RoHS=YES, Stock 1=456, Supplier 1=Mouser, SVHC="No SVHC (17-Dec-2015", Topology=Buck-Boost
U2: library part "INT - SN65HVD72"
U3: library part "SEN - MPU-9250", "IMU ACCEL/GYRO/MAG I2C/SPI 24QFN", Case/Package=QFN, Manufacturer="TDK InvenSense", Max Operating Temperature=85°C, Max Supply Voltage=3.6V, Min Operating Temperature=-40°C, Min Supply Voltage=2.4V, Package Quantity=1, Supplier Part Number 1=883-7942P, ComponentLink1Description=https://datasheet.ciiva.com/29175/mpu-9250-29175105.pdf?src-supplier=Digi-Key, ComponentLink1URL=https://datasheet.ciiva.com/29175/mpu-9250-29175105.pdf?src-supplier=Digi-Key, Height=1mm, Interface=I2C, Length=3.1mm, Manufacturer Part Number=MPU-9250, Mount="Surface Mount", Number of Pins=24, Output Type=SPI, RoHS=Yes, Sensor Type=Accelerometer, Stock 1=0, Supplier 1=RSComponents, Width=3.1mm
U4: library part "INT - SN74LV4052A", "Analog Multiplexer/Demultiplexer, 4:1, 2 Circuits, 100ohm, 2V to 5.5V Supply, SOIC-16"

## Free pads (board coordinates)
  round 6 hole 2.75: 0(3.55,3.55) 0(3.55,26.55) 0(61.55,3.55) 0(61.55,26.55)

## Via types
v1: diameter 0.6, hole 0.3, Top Layer to Bottom Layer, tented both sides, 39 vias
v2: diameter 0.5, hole 0.3, Top Layer to Bottom Layer, tented bottom, 4 vias

## Nets (pads, with @x,y where several pads share a name; then routed paths per layer and width w, separated by ;. In a path a pad name is that pad's centre, name@x,y a point inside that pad or via, vN(x,y) a via of type N, cw(c..) or ccw(c..) an arc to the next point about the centre after c; other vN are vias at no path point)
+3.3V: C7.2 C8.1 C9.1 C11.2 C12.2 CON1.1 CON1.17 R5.2 R13.2 R15.2 R17.2 R19.2 T2.1 T3.1 T4.1 T5.1 U2.8 U3.8 U3.13 U4.16 | length 124.6
  Top Layer w0.203: C8.1@31.65,11.7 31.9,11.95 31.9,12.167 31.746,12.321 31.746,12.779 31.9,12.933 U3.8 ; U3.13 C9.1
  Top Layer w0.3: T2.1 40.45,21.063 40.637,21.25 R13.2 v1(44.6,21.25) ; v1(39.9,16.6) 39.67,16.83 T3.1 40.53,17.63 40.75,17.85 R15.2 ; T5.1@55.476,10.35 T5.1 ; R19.2 55.7,9.5 55.5,9.7 T5.1 ; R17.2 57.3,20.95 57.47,20.78 T4.1 57.47,19.78 59.7,17.55 62.85,17.55 63.6,16.8 63.6,13.35 62.85,12.6 58.25,12.6 56.9,11.25 56.15,11.25 55.5,10.6 T5.1
  Top Layer w0.4: U2.8@21.07,14.7 C7.2 22.7,14.75 22.7,15.7 ; R5.2@22.65,16.45 R5.2 22.7,15.7 ; v1(23.95,15.7) 22.7,15.7 ; v1(27.25,14.05) 29,14.05 v1(29.95,13.1) C8.1 ; U4.16 52.42,8.88 C12.2 C11.2 55.676,8.85 R19.2
  Top Layer w0.5: C8.1@31.5,11.45 31.55,11.5 C8.1 ; v1(35.85,12.55) 35.85,12.95 C9.1 ; v1(50.45,13.1) 52,13.1 52.42,12.68 U4.16
  Bottom Layer w0.4: v1(23.95,15.7) 24.8,15.7 26.45,14.05 v1(27.25,14.05)
  Bottom Layer w0.5: CON1.1 9.965,23.75 27.199,23.75 ; CON1.17 27.199,23.75 ; v1(50.45,13.1) 49.05,13.1 45.2,16.95 45.2,20.65 v1(44.6,21.25) 44.55,21.25 v1(39.9,16.6) v1(35.85,12.55) 35.148,11.848 31.202,11.848 v1(29.95,13.1) 28.9,14.15 28.9,15.6 27.199,17.301 27.199,23.75
+5V: C1.2 C2.2 CON1.2 CON1.4 CON2.1 R2.2 R3.2 R14.2 R16.2 R18.2 R20.2 U1.12 U1.13 | length 106.7
  Top Layer w0.3: CON1.4@10.878,27.833 CON1.4 ; R16.2 38.37,17.9 ; R14.2 37.057,21.283 38.6,19.74 38.6,18.13 38.37,17.9 ; v1(39.7,15.15) 38.6,16.25 38.6,17.67 38.37,17.9
  Top Layer w0.4: R2.2 R3.2 8.35,20.65 8.4,20.7 8.45,20.65
  Top Layer w0.5: C2.2 9.7,23 9.7,27.733 9.8,27.833 ; v1(54.95,12.85) 55.75,13.65 R20.2 ; R18.2 v1(58.45,16.35)
  Top Layer w0.75: C2.2 7.1,23.1 7.1,26.511 CON1.2 9.8,27.833 CON1.4@10.878,27.833
  Bottom Layer w0.3: 39.7,11 v1(39.7,15.15)
  Bottom Layer w0.75: CON1.2 7.1,26.511 7.1,23.8 8.25,22.65 20.4,22.65 28.1,14.95 28.1,13.574 30.674,11 39.7,11 40.6,11 41.8,12.2 54.3,12.2 v1(54.95,12.85) v1(58.45,16.35) 60.934,18.834 CON2.1
+9V: C3.2 C4.2 C5.2 P1.1 P2.1 R1.2 U1.7 U1.8 | length 51.7
  Top Layer w0.5: R1.2 C4.2
  Top Layer w0.9: C5.2 8.45,5.5 9.15,4.8 12.4,4.8 P1.1 18.3,5 30.55,5 P2.1
  Bottom Layer w1: P1.1 17.6,5.7 31.25,5.7 P2.1
A: D1.2 P1.2 P2.2 R8.1 R9.2 | length 27.9
  Top Layer w0.3: R9.2 18.2,10.45 19,9.65 19,7.9 P1.2 20.75,6.05 23.3,6.05 24.17,6.92 D1.2 24.19,11 R8.1 27.34,9.41 35.34,9.41 P2.2
ACCEL_INT: CON1.31 U3.12 | length 18.1
  Top Layer w0.203: U3.12 33.85,13.5 34,13.35 v1(34.7,13.35)
  Bottom Layer w0.203: CON1.31@46.522,25.172 CON1.31
  Bottom Layer w0.3: v1(34.7,13.35) CON1.31@46.522,25.172
B: D1.1 P1.3 P2.3 R6.2 R8.2 | length 26
  Top Layer w0.3: R6.2 19.97,10.98 D1.1 ; P1.3 22.45,9.646 22.23,9.866 D1.1 ; P2.3 38.388,9.862 28.388,9.862 R8.2 26.083,12.167 24.017,12.167 22.83,10.98 D1.1
BOOST_EN: CON1.24 R3.1 U1.14 | length 39.3
  Top Layer w0.203: 6.724,18.7 6.75,18.7
  Top Layer w0.25: v1(6.174,18.15) 6.724,18.7
  Top Layer w0.3: R3.1 6.75,18.7 7.711,17.739 U1.14 ; v1(12.25,20.45) 12.65,20.05 16.3,20.05 16.5,20.25 16.5,22.35 16.7,22.55 22.6,22.55 24.95,24.9 24.95,25.85 25.75,26.65 35.179,26.65 CON1.24
  Bottom Layer w0.3: v1(6.174,18.15) 8.474,20.45 v1(12.25,20.45)
CS: CON1.29 U3.22 | length 16.7
  Top Layer w0.203: U3.22 32.3,17 32.95,17.65 v1(34.55,17.65)
  Bottom Layer w0.3: v1(34.55,17.65) 38.15,17.65 43.982,23.482 CON1.29
DRIVER_EN: CON1.22 R7.2 | length 10.2
  Top Layer w0.3: R7.2 29.45,20.329 31.171,22.05 v1(32.55,22.05)
  Bottom Layer w0.3: v1(32.55,22.05) 32.55,24.65 32.55,26.561 CON1.22
GND: C1.1 C2.1 C3.1 C4.1 C5.1 C6.1 C7.1 C8.2 C9.2 C10.2 C11.1 C12.1 CON1.6 CON1.9 CON1.14 CON1.20 CON1.25 CON1.30 CON1.34 CON1.39 CON2.4 D1.3 P1.4 P2.4 R4.1 R12.1 T1.2 U1.4 U1.6 U1.10 U1.15 U2.5 U3.11 U3.18 U3.25 U4.7 U4.8 | length 100.9
  Top Layer w0.203: R4.1 5.3,12.95 5.05,13.2 C6.1 5.65,13.95 5.9,14.2 5.9,14.7 6.174,14.974 U1.4 7.426,14.974 ; 7.4,15.947 7.4,16.219 7.881,16.7 8.9,16.7 10.35,18.15 C1.1 ; 7.426,15.526 7.426,14.974 ; U1.6 7.711,14.69 7.426,14.974 ; C5.1 10.35,9.09 C4.1 C3.1 13.77,11.32 14.55,12.1 14.55,14.69 ; CON1.6 13.502,26.802 12.25,25.55 12.25,24.7 10.35,22.8 C2.1 C1.1 ; C7.1 C7.1@24.16,14.69 ; R12.1 24.55,20.15 24.55,19.45 24.33,19.23 T1.2 24.33,17.72 24.5,17.55 25.7,17.55 26.15,17.1 26.15,15.19 25.65,14.69 ; v2(33.008,14.619) 33.1,14.527 U3.11 33.1,13.1 33.7,12.5 34.5,12.5 34.6,12.4 C10.2 ; v2(33.008,15.381) 33.623,15.996 34,15.996 U3.18 36.4,16 37.35,15.05 C9.2 ; U4.7 U4.8 41.95,16.5 39.45,14 C9.2 ; C1.1 13.95,19.55 14.55,18.95 14.55,14.69 ; 14.55,14.69 14.56,14.7 U2.5 17.16,12.85 16.9,12.59 16.9,12 17.15,11.75 21.126,11.75 22.296,12.92 D1.3 23.963,12.92 24.17,13.127 24.17,14.68 C7.1@24.16,14.69 ; C7.1@24.16,14.69 25.65,14.69 ; 25.65,14.69 28.79,11.55 C8.2 30,10.9 30.35,10.55 34.2,10.55 34.6,10.95 C10.2 ; C10.2 36.8,11.55 37.35,12.1 C9.2
  other v1: 6.45,12.224 9.65,13.127 6.32,13.95 5.65,17.303 6.5,17.327 9.75,17.7
  other v2: 31.992,14.619 31.992,15.381
MISO: CON1.21 U3.9 | length 14.3
  Top Layer w0.203: v1(32.3,12.55) U3.9
  Bottom Layer w0.3: v1(32.3,12.55) 33.822,14.072 CON1.21
MOSI: CON1.19 U3.24 | length 8.9
  Top Layer w0.203: U3.24 v1(31.5,17.6)
  Bottom Layer w0.3: CON1.19 31.282,18.568 31.5,18.35 v1(31.5,17.6)
NetC6_2: C6.2 U1.3 | length 1.8
  Top Layer w0.203: C6.2 5.074,15.474 U1.3
NetC10_1: C10.1 U3.10 | length 2.1
  Top Layer w0.203: U3.10 32.7,12.933 33.1,12.533 C10.1
NetL1_1: L1.1 U1.11
NetL1_2: L1.2 U1.9
NetR1_1: R1.1 R4.2 U1.5 | length 6.5
  Top Layer w0.203: R4.2 6.4,10.7 7.211,11.511 U1.5
  Top Layer w0.5: R1.1 R4.2
NetR2_1: R2.1 U1.1 | length 4.2
  Top Layer w0.203: R2.1 5.05,16.85 5.426,16.474 U1.1
NetR5_1: R5.1 T1.3 U2.2 U2.3 | length 9.2
  Top Layer w0.3: U2.3 U2.2 19.7,18.3 20,18 R5.1 ; R5.1@22.68,18.02 R5.1 ; T1.3 24.196,16.504 R5.1
NetR6_1: R6.1 U2.7 | length 2.3
  Top Layer w0.3: U2.7 19.7,13.227 19.95,12.977 R6.1
NetR7_1: R7.1 R10.1 R11.2 | length 3.3
  Top Layer w0.3: R10.1 R11.2 R7.1
NetR9_1: R9.1 U2.6 | length 2.3
  Top Layer w0.3: R9.1 18.2,13.02 18.43,13.25 U2.6
NetR11_1: R11.1 R12.2 T1.1 | length 3.5
  Top Layer w0.3: T1.1 26.27,19.25 26.1,19.42 R12.2 26.15,20.15 26.729,20.15 26.879,20.3 R11.1
RS485_RX: R14.1 T2.3 U2.1 | length 18.2
  Top Layer w0.3: U2.1 21.7,19.9 24.583,22.783 R14.1 36.55,22.033 T2.3
RS485_TX: R10.2 R16.1 T3.3 U2.4 | length 25.8
  Top Layer w0.203: U2.4@17.15,19.89 U2.4
  Top Layer w0.3: v1(17.15,18.35) U2.4@17.15,19.89 ; v1(26.7,14.8) 26.8,14.8 R10.2 30.248,17.2 32.448,19.4 R16.1 36.6,18.6 T3.3
  Bottom Layer w0.3: v1(17.15,18.35) 23.15,18.35 v1(26.7,14.8)
RX2: CON2.2 R18.1 T4.3 | length 9.5
  Top Layer w0.3: T4.3 56.5,17.85 55.75,17.1 R18.1 55.75,16.15 56.7,15.2 59.65,15.2 60.784,16.334 CON2.2
SCK: CON1.23 U3.23 | length 12.2
  Top Layer w0.203: U3.23 31.9,17.122 33.328,18.55 v1(34.55,18.55)
  Bottom Layer w0.3: v1(34.55,18.55) 36,18.55 36.362,18.912 CON1.23
TX2: CON2.3 R20.1 T5.3 | length 6.8
  Top Layer w0.3: T5.3 56.47,12.34 57.25,13.12 R20.1 62.167,13.824 CON2.3
UART_INH: CON1.18 U4.6 | length 31.9
  Top Layer w0.3: v1(46.05,18.25) 46.05,16.52 U4.6
  Bottom Layer w0.3: CON1.18 30.009,29.1 37.15,29.1 37.65,28.6 37.65,27.05 38.1,26.6 47.15,26.6 47.7,26.05 47.7,21.27 46.05,19.62 v1(46.05,18.25)
UART_RX: CON1.10 U4.3 | length 64.5
  Top Layer w0.3: v1(14.1,21.5) 14.1,22.25 16,24.15 16.95,24.15 17.3,24.5 17.3,26.551 CON1.10 ; U4.3 49.88,15.12 50.85,14.15 52.5,14.15 54.142,12.508 v1(54.142,10.8)
  Bottom Layer w0.3: v1(14.1,21.5) 14.1,18.7 23.5,9.3 27.71,9.3 27.713,9.298 52.64,9.298 v1(54.142,10.8)
UART_RX1: R13.1 T2.2 U4.1 | length 16.8
  Top Layer w0.3: T2.2@39.65,23 40.5,23 40.75,22.75 R13.1 48.42,22.75 52.42,18.75 U4.1
UART_RX2: R17.1 T4.2 U4.5 | length 13
  Top Layer w0.3: U4.5 47.34,17.84 47.75,18.25 v1(51.6,18.25) ; v1(53.35,18.25) 54.41,18.25 54.58,18.08 55.53,19.03 T4.2 55.53,20.73 55.8,21 R17.1
  Bottom Layer w0.3: v1(51.6,18.25) v1(53.35,18.25)
UART_RX3: U4.2
UART_RX4: U4.4
UART_SEL_A: CON1.16 U4.10 | length 52.3
  Top Layer w0.3: v1(15.8,20.7) 15.8,22.6 16.25,23.05 20.833,23.05 22.383,24.6 22.383,25.783 23.25,26.65 25.019,26.65 CON1.16 ; v1(42.45,10.3) 43.1,9.65 44.35,9.65 44.75,10.05 44.75,11.25 U4.10
  Bottom Layer w0.3: v1(15.8,20.7) 15.8,17.7 17.55,15.95 21.7,15.95 27.9,9.75 41.9,9.75 v1(42.45,10.3)
UART_SEL_B: CON1.12 U4.9 | length 46.1
  Top Layer w0.3: v1(15,21.5) 15,22.5 16.1,23.6 18.95,23.6 19.85,24.5 19.85,26.561 CON1.12 ; v1(42.1,11.1) 42.3,11.3 U4.9
  Bottom Layer w0.3: v1(15,21.5) 16.05,21.5 16.55,21 16.55,18.602 16.548,18.6 16.548,18.1 16.55,18.098 16.55,17.65 17.75,16.45 22.05,16.45 28.25,10.25 41.25,10.25 v1(42.1,11.1)
UART_TX: CON1.8 U4.13 | length 63.6
  Top Layer w0.3: v1(13.1,21.5) 13.1,22.95 14.75,24.6 14.75,26.541 CON1.8 ; U4.13 48.65,11.26 v1(48.65,8.25)
  Bottom Layer w0.3: v1(13.1,21.5) 13.1,7.55 16,4.65 46.45,4.65 48.65,6.85 v1(48.65,8.25)
UART_TX1: R15.1 T3.2 U4.12 | length 15.5
  Top Layer w0.3: T3.2 40.48,19.57 40.7,19.35 R15.1 v1(44.35,19.35) ; v1@45.49,13.64 v1(45.5,13.65) 46.6,13.65 47.34,12.91 U4.12
  Bottom Layer w0.3: v1(44.35,19.35) 43.4,18.4 43.4,15.75 v1(45.5,13.65)
UART_TX2: R19.1 T5.2 U4.14 | length 16
  Top Layer w0.3: U4.14 49.88,7.17 51.45,5.6 55.5,5.6 57.2,7.3 R19.1 57.2,9.41 57.44,9.65 T5.2
UART_TX3: U4.15
UART_TX4: U4.11
pads on no net: CON1.3 CON1.5 CON1.7 CON1.11 CON1.13 CON1.15 CON1.26 CON1.27 CON1.28 CON1.32 CON1.33 CON1.35 CON1.36 CON1.37 CON1.38 CON1.40 U1.2 U3.1 U3.2 U3.3 U3.4 U3.5 U3.6 U3.7 U3.14 U3.15 U3.16 U3.17 U3.19 U3.20 U3.21

## Polygon pours and split planes (outlines as drawn)
GND on Bottom Layer "Bottom Layer-GND" (solid, shelved, pour order 38): 0,30.103 0,0 65.101,0 65.101,30.101
GND on Top Layer "Top Layer-GND" (solid, remove dead copper, shelved, pour order 36): 0,30.101 65.101,30.101 65.101,0 0,0

## Keep-outs
Keep-Out Layer:
  lines w0.076: 0,3.05 ccw(c3.05,3.05) 3.05,0 62.05,0 ccw(c62.05,3.05) 65.101,3.05 65.101,27.05 ccw(c62.05,27.05) 62.05,30.101 3.05,30.101 ccw(c3.05,30.05) 3.05,30.101 ccw(c3.05,27.05) 0,27.05 0,3.05
Mechanical 1:
  lines w0.1: 62.05,0.05 ccw(c62.05,3.05) 65.05,3.05 ; 0.05,3.05 ccw(c3.05,3.05) 3.05,0.05 ; 0.05,3.05 ccw(c3.05,3.05) 3.05,0.05 ; 0.05,3.05 0.05,27.05 ; 0.05,3.05 0.05,27.05 ; 0.05,27.05 cw(c3.05,27.05) 3.05,30.05 ; 0.05,27.05 cw(c3.05,27.05) 3.05,30.05 ; 3.05,0.05 62.2,0.05 3.05,0.05 ; 3.05,30.05 62.05,30.05 ; 3.05,30.05 62.05,30.05 ; 62.05,30.05 cw(c62.05,27.05) 65.05,27.05 ; 62.05,30.05 cw(c62.05,27.05) 65.05,27.05 ; 65.05,3.05 65.05,27.05 ; 65.05,3.05 65.05,27.05

## Other copper
Top Layer:
  region net +5V: 8.08,21.75 8.08,17.1 8.84,17.1 8.84,21.75
  region net +9V: 8,14.43 8,6.9 8.9,6.9 8.9,14.43
  pour cut-out: 10.65,18.45 13.65,18.45 13.65,13.05 10.65,13.05
  region net NetL1_2: 8.05,15.1 9.1,15.1 10.95,13.25 13.4,13.25 13.4,14.85 12.9,15.35 8.05,15.35
  region net NetL1_1: 8.05,16.1 12.85,16.1 13.4,16.65 13.4,18.25 11,18.25 9.1,16.35 8.05,16.35

## Silkscreen, mask and mechanical layers (free items; w line width, h text height)
Top Overlay:
  text "irnas.eu" at 49.4,0.85 h1
Bottom Overlay:
  text "+5V" at 59.35,18.2 h1
  text "RX2" at 59.35,15.85 h1
  text "TX2" at 59.35,13.3 h1